# Altium PCB MSP430F2132.PcbDoc
Units mm, origin at the board's own origin, x right, y up, seen from the top; angles counter-clockwise.
Board outline 84.5 x 50 mm, 2 copper layers (Top Layer, Bottom Layer); 56 components, 60 nets, 235 pads, 57 vias.
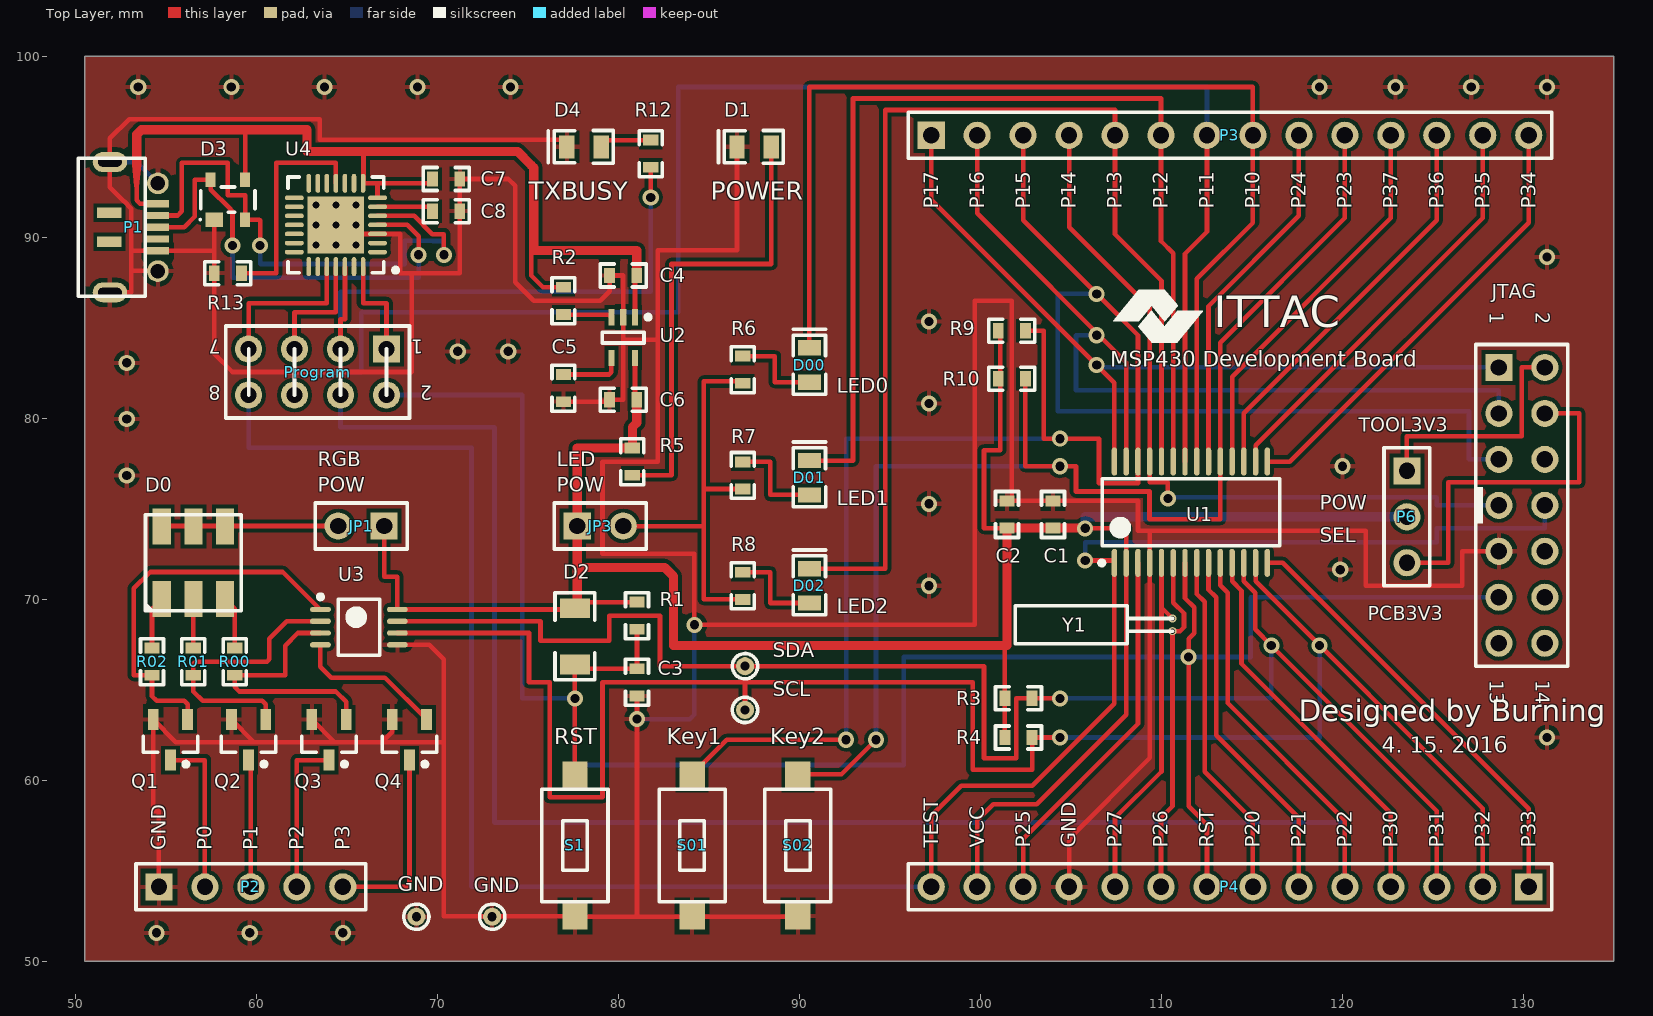
[diagram p0: Top Layer view]
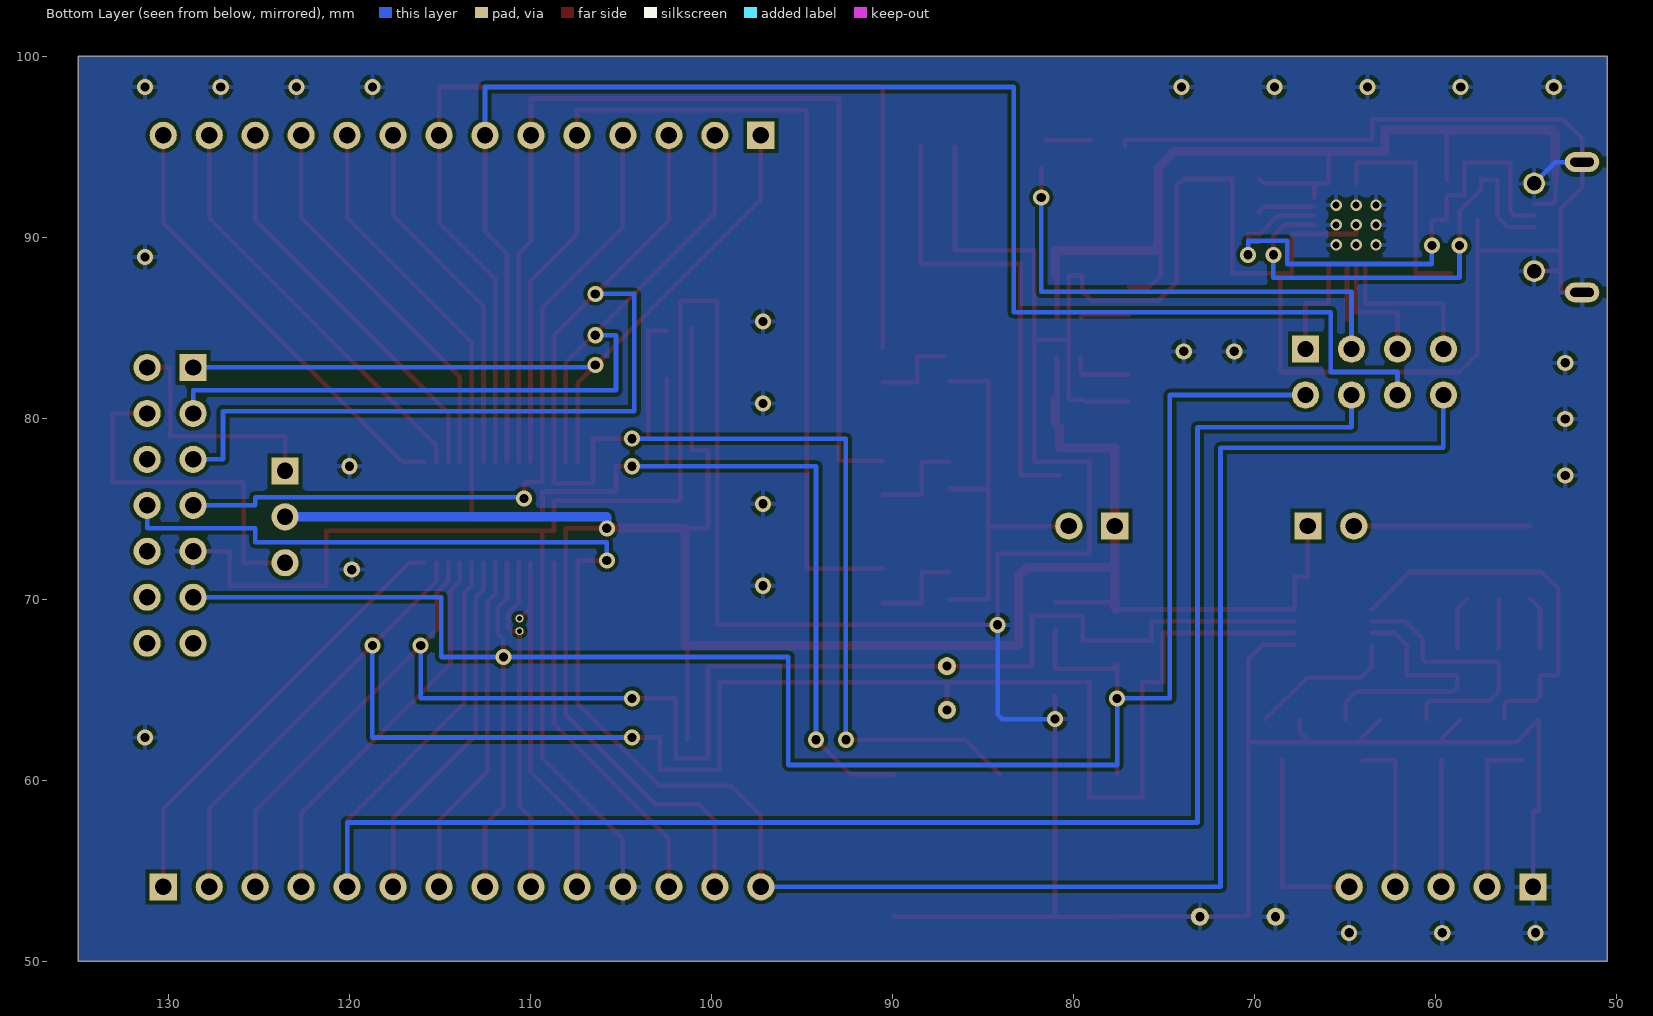
[diagram p1: Bottom Layer view, seen from below]

## Layer stack, top to bottom
Top Solder: solder mask 0.0102, Solder Resist, Dk 3.5
Top Layer: signal copper 0.0356
Dielectric 1: dielectric 0.32, FR-4, Dk 4.8
Bottom Layer: signal copper 0.0356
Bottom Solder: solder mask 0.0102, Solder Resist, Dk 3.5

## Board outline
50.5,50 50.5,100 135,100 135,50

## Design rules (kind name [scope] priority, off if disabled: settings)
Clearance [All] p1: gap=0.203
PolygonConnect [All] p1: connectstyle=Relief reliefconductorwidth=0.254 reliefentries=4 polygonreliefangle="90 Angle" airgapwidth=0.254
RoutingVias [All] p1: holewidth=0.711 width=1.27 viastyle="Through Hole" minholewidth=0.3 minwidth=0.5 maxholewidth=0.711 maxwidth=2
SolderMaskExpansion [All] p1: expansion=0.102
UnpouredPolygon [All] p1: allowunpoured=FALSE
Width [All] p1: maxlimit=0.762 minlimit=0.254 preferedwidth=0.254
29 further rules are at their usual default settings.

## Components (designator, comment, footprint, x,y, rotation, side; value= is the part's Value field where it differs from the comment)
C1 "Cap" D0603 104.013,74.676 r270 top
C2 "Cap" D0603 101.473,74.676 r270 top
C3 "Cap" D0603 81.026,65.405 r90 top
C4 "Cap" D0603 80.264,87.884 r0 top
C5 "Cap" D0603 76.962,81.661 r90 top
C6 "Cap" D0603 80.264,81.026 r180 top
C7 "Cap" D0603 70.485,93.218 r0 top
C8 "Cap" D0603 70.485,91.44 r180 top
D00 "LED0" D0805_Diode 90.551,82.931 r90 top
D0 "RGB_LED" LED5050 56.515,72.009 r270 top
D1 "LED0" D0805_Diode 87.503,94.996 r180 top
D01 "LED0" D0805_Diode 90.551,76.708 r90 top
D2 "1N4148" D1206 77.597,67.945 r90 top
D02 "LED0" D0805_Diode 90.551,70.739 r90 top
D3 "SP0503BAHT" SOT143_4 58.42,92.075 r90 top
D4 "LED0" D0805_Diode 78.105,94.996 r180 top
GND "TP" TP0_8 68.834,52.451 r90 top (schematic designator TP4)
GND "TP" TP0_8 73.025,52.451 r0 top (schematic designator TP1)
JP1 "JP" HDR1X2 67.056,74.041 r180 top
JP3 "JP" HDR1X2 77.724,74.041 r0 top
JTAG "Header 7X2" HDR2X7 128.651,82.804 r270 top
P1 "Micro USB" Micro.Horn 53.213,90.551 r90 top
P2 "Header 5" HDR1X5 54.61,54.102 r0 top
P3 "Header 14" HDR1X14 97.282,95.631 r0 top
P4 "Header 14" HDR1X14 130.302,54.102 r180 top
P6 "Header 3" HDR1X3 123.571,77.089 r270 top
Program "Header 4X2" HDR2X4 67.183,83.82 r180 top (schematic designator JP4)
Q1 "NMOS-2" SOT23_N 55.245,62.23 r270 top
Q2 "NMOS-2" SOT23_N 59.563,62.23 r270 top
Q3 "NMOS-2" SOT23_N 64.008,62.23 r270 top
Q4 "NMOS-2" SOT23_N 68.453,62.23 r270 top
R00 "Res1" D0603 58.801,66.548 r270 top
R1 "Res1" D0603 81.026,69.088 r90 top
R01 "Res1" D0603 56.515,66.548 r270 top
R2 "Res1" D0603 76.962,86.487 r90 top
R02 "Res1" D0603 54.229,66.548 r270 top
R3 "Res1" D0603 102.108,64.516 r0 top
R4 "Res1" D0603 102.108,62.357 r0 top
R5 "Res1" D0603 80.772,77.597 r90 top
R6 "Res1" D0603 86.868,82.677 r270 top
R7 "Res1" D0603 86.868,76.835 r270 top
R8 "Res1" D0603 86.868,70.739 r270 top
R9 "Res1" D0603 101.734,84.836 r180 top
R10 "Res1" D0603 101.734,82.169 r180 top
R12 "Res1" D0603 81.788,94.615 r270 top
R13 "Res1" D0603 58.42,88.011 r0 top
S1 "SW-PB" SW_A 77.597,56.388 r90 top
S01 "SW-PB" SW_A 84.074,56.388 r270 top
S02 "SW-PB" SW_A 89.916,56.388 r270 top
SCL "TP" TP0_8 86.995,63.881 r90 top (schematic designator TP3)
SDA "TP" TP0_8 86.995,66.294 r90 top (schematic designator TP2)
U1 "MSP430F21x2" TSSOP28 111.633,74.803 r90 top
U2 "RT9193" SC70-5 80.264,84.455 r270 top
U3 "PCA9633DP1" TSSOP8 65.659,68.453 r0 top
U4 "CP2102" QFN28 64.389,90.678 r180 top
Y1 "XTAL" XTAL2X6 110.617,68.58 r0 top

## Footprints (in the part's own frame and the unit in brackets; to place one, negate y for a bottom-side part, rotate by r counter-clockwise, add the part's x,y. Pads: shape width x height; smd on the part's side, far side on the other; paste and mask are expansions set on the pad)
D0603 [mm] "D0603"
  rect 0.6x0.85 smd: 1(-0.75,0) 2(0.75,0)
  silkscreen extent -1.27,-0.64 1.27,0.64, body extent -0.8,-0.4 0.8,0.4, height 0.5
D0805_Diode [mm] "D0805 Diode"
  rect 0.85x1.27 smd: 1(-0.95,0) 2(0.95,0)
  silkscreen extent -1.6,-0.9 1.97,0.9, body extent -1,-0.64 1,0.64, height 1.25
D1206 [mm] "D1206"
  rect 1.1x1.65 smd: 1(-1.55,0) 2(1.55,0)
  silkscreen extent -2.4,-1.1 2.4,1.1, body extent -1.6,-0.8 1.6,0.8, height 1.1
HDR1X2 [mm] "Connector; Header; 2 Position"
  rect 1.5x1.5 hole 0.9: 1(0,0)
  round 1.5 hole 0.9: 2(2.54,0)
  silkscreen extent -1.27,-1.27 3.81,1.27
HDR1X3 [mm] "Connector; Header; 3 Position"
  rect 1.5x1.5 hole 0.9: 1(0,0)
  round 1.5 hole 0.9: 2(2.54,0) 3(5.08,0)
  silkscreen extent -1.27,-1.27 6.35,1.27
HDR1X5 [mm] "Connector; Header; 5 Position"
  rect 1.5x1.5 hole 0.9: 1(0,0)
  round 1.5 hole 0.9: 2(2.54,0) 3(5.08,0) 4(7.62,0) 5(10.16,0)
  silkscreen extent -1.27,-1.27 11.43,1.27
HDR1X14 [mm] "Connector; Header; 14 Position"
  rect 1.5x1.5 hole 0.9: 1(0,0)
  round 1.5 hole 0.9: 2(2.54,0) 3(5.08,0) 4(7.62,0) 5(10.16,0) 6(12.7,0) 7(15.24,0) 8(17.78,0) 9(20.32,0) 10(22.86,0) 11(25.4,0) 12(27.94,0) 13(30.48,0) 14(33.02,0)
  silkscreen extent -1.27,-1.27 34.29,1.27
HDR2X4 [mm] "Connector; Header; 4x2 Position"
  rect 1.5x1.5 hole 0.9: 1(0,0)
  round 1.5 hole 0.9: 2(0,2.54) 3(2.54,0) 4(2.54,2.54) 5(5.08,0) 6(5.08,2.54) 7(7.62,0) 8(7.62,2.54)
  silkscreen extent -1.27,-1.27 8.89,3.81
HDR2X7 [mm] "Connector; Header; 7x2 Position"
  rect 1.5x1.5 hole 0.9: 1(0,0)
  round 1.5 hole 0.9: 2(0,2.54) 3(2.54,0) 4(2.54,2.54) 5(5.08,0) 6(5.08,2.54) 7(7.62,0) 8(7.62,2.54) 9(10.16,0) 10(10.16,2.54) 11(12.7,0) 12(12.7,2.54) 13(15.24,0) 14(15.24,2.54)
  silkscreen extent -1.27,-1.27 16.51,3.81
LED5050 [mm] "LED5050"
  rect 2x1 smd mask+0.05: 1(-2,1.75) 2(-2,0) 3(-2,-1.75) 4(2,-1.75) 5(2,0) 6(2,1.75)
  silkscreen extent -2.65,-2.65 2.65,2.65, body extent -2.5,-2.5 2.5,2.5, height 1.6
Micro.Horn [mm]
  oval 1.1x1.9 hole 0.5 slot 1.3 at 90 deg: 0(-3.6,1.313) 0(3.6,1.313)
  round 1.2 hole 0.8: 0(-2.425,-1.337) 0(2.425,-1.337)
  rect 0.6x1.35 smd: 0(-0.8,1.338) 0(0.8,1.338)
  rect 0.4x1.25 smd: 1(1.3,-1.337) 2(0.65,-1.337) 3(0,-1.337) 4(-0.65,-1.337) 5(-1.3,-1.337)
  silkscreen extent -3.81,-0.64 3.81,3.06
QFN28 [mm] "QFN, 28-Leads, Body 5.00x5.00mm, Pitch 0.50mm, Thermal Pad 3.13x3.13mm, IPC Medium Density"
  oval 1.05x0.25 smd: 1(-2.3,1.5) 2(-2.3,1) 3(-2.3,0.5) 4(-2.3,0) 5(-2.3,-0.5) 6(-2.3,-1) 7(-2.3,-1.5) 15(2.3,-1.5) 16(2.3,-1) 17(2.3,-0.5) 18(2.3,0) 19(2.3,0.5) 20(2.3,1) 21(2.3,1.5)
  oval 0.25x1.05 smd: 8(-1.5,-2.3) 9(-1,-2.3) 10(-0.5,-2.3) 11(0,-2.3) 12(0.5,-2.3) 13(1,-2.3) 14(1.5,-2.3) 22(1.5,2.3) 23(1,2.3) 24(0.5,2.3) 25(0,2.3) 26(-0.5,2.3) 27(-1,2.3) 28(-1.5,2.3)
  rect 3.13x3.13 smd: 29(0,0)
  silkscreen extent -3.43,-2.65 2.65,2.65, body extent -2.5,-2.5 2.5,2.5, height 1
SC70-5 [mm] "SC70, 5-Leads, Body 2.03x2.13mm, Pitch 0.65mm, IPC Medium Density"
  rect 0.9x0.35 smd: 1(-1.125,0.65) 2(-1.125,0) 3(-1.125,-0.65) 4(1.125,-0.65) 5(1.125,0.65)
  silkscreen extent -1.25,-1.15 0.3,1.5, body extent -0.67,-1.12 0.67,1.13, height 1.1
SOT23_N [mm] "SOT23, 3-Leads, Body 2.9x1.3mm, Pitch 0.95mm, Lead Span 2.3mm - Reverse Pinning, IPC Medium Density"
  rect 1.15x0.6 smd: 1(-1.125,0.95) 2(1.125,0) 3(-1.125,-0.95)
  silkscreen extent -0.2,-1.5 1.47,1.5, body extent -0.7,-1.5 0.7,1.5, height 1.1
SOT143_4 [mm] "SOT143, 4-Leads, Body 2.92x2.37mm, Pitch 1.90mm, IPC High Density"
  rect 0.8x0.95 smd: 1(-1.1,0.75)
  rect 0.8x0.55 smd: 2(-1.1,-0.95) 3(1.1,-0.95) 4(1.1,0.95)
  silkscreen extent -1.15,-1.5 0.7,1.57, body extent -0.7,-1.52 0.7,1.52, height 1.2
SW_A [mm] "SMA Switch"
  rect 1.5x1.4 smd mask+0.05: 1(-3.9,0) 2(3.9,0)
  silkscreen extent -3.1,-1.83 3.1,1.83, body extent -3.1,-1.83 3.1,1.83, height 2
TP0_8 [mm] "Test Point"
  round 1 hole 0.5 mask+0.05: 1(0,0)
  silkscreen extent -0.7,-0.7 0.7,0.7
TSSOP8 [mm] "TSOP, 8-Leads, Body 3.00x3.00mm, Pitch 0.65mm, IPC Medium Density"
  oval 1.15x0.3 smd: 1(-2.125,0.975) 2(-2.125,0.325) 3(-2.125,-0.325) 4(-2.125,-0.975) 5(2.125,-0.975) 6(2.125,-0.325) 7(2.125,0.325) 8(2.125,0.975)
  silkscreen extent -2.25,-1.55 1.15,1.8, body extent -1.55,-1.55 1.55,1.55, height 1.1
TSSOP28 [mm] "TSOP, 28-Leads, Body 9.70x4.40mm, Pitch 0.65mm, IPC High Density"
  oval 1.55x0.3 smd: 1(-2.8,4.225) 2(-2.8,3.575) 3(-2.8,2.925) 4(-2.8,2.275) 5(-2.8,1.625) 6(-2.8,0.975) 7(-2.8,0.325) 8(-2.8,-0.325) 9(-2.8,-0.975) 10(-2.8,-1.625) 11(-2.8,-2.275) 12(-2.8,-2.925) 13(-2.8,-3.575) 14(-2.8,-4.225) 15(2.8,-4.225) 16(2.8,-3.575) 17(2.8,-2.925) 18(2.8,-2.275) 19(2.8,-1.625) 20(2.8,-0.975) 21(2.8,-0.325) 22(2.8,0.325) 23(2.8,0.975) 24(2.8,1.625) 25(2.8,2.275) 26(2.8,2.925) 27(2.8,3.575) 28(2.8,4.225)
  silkscreen extent -2.92,-4.9 1.85,5.05, body extent -2.25,-4.9 2.25,4.9, height 1.2
XTAL2X6 [mm] "XTAL2"
  round 0.45 hole 0.3 mask+0.05: 1(0,0.35) 2(0,-0.35)
  silkscreen extent -8.7,-1.05 0,1.05, body extent -8.7,-1.05 -2.5,1.05, height 2.1

## Part data
C1 C2 C3 C4 C5 C6 C7 C8: "Capacitor"
D00 D1 D01 D02 D4: "Typical INFRARED GaAs LED"
D2: library part "Diode 1N4148", "High Conductance Fast Diode"
JP1 JP3: library part "Header 2", "Header, 2-Pin"
JTAG: "Header, 7-Pin, Dual row"
P1: library part "Micro USB Horn", "MIcro USB Connector Horn"
P2: "Header, 5-Pin"
P3 P4: "Header, 14-Pin"
P6: "Header, 3-Pin"
Program: "Header, 4-Pin, Dual row"
Q1 Q2 Q3 Q4: "N-Channel Power MOSFET"
R00 R1 R01 R2 R02 R3 R4 R5 R6 R7 R8 R9 R10 R12 R13: "Resistor"
S1 S01 S02: "Switch"
U1: library part MSP430F21x2_PW, "MSP430F21x2_PW"
U2: "3V3 Voltage Regulator"
Y1: "Crystal Oscillator"

## Via types
v1: diameter 0.889, hole 0.508, Top Layer to Bottom Layer, tented both sides, 48 vias
v2: diameter 0.635, hole 0.381, Top Layer to Bottom Layer, tented both sides, 9 vias

## Nets (pads, with @x,y where several pads share a name; then routed paths per layer and width w, separated by ;. In a path a pad name is that pad's centre, name@x,y a point inside that pad or via, vN(x,y) a via of type N, cw(c..) or ccw(c..) an arc to the next point about the centre after c; other vN are vias at no path point)
3V3: C1.2 C2.2 C6.1 D2.2 JP1.1 JP3.1 P4.13 P6.2 R1.2 R3.1 R4.1 R5.2 R9.2 R10.2 U1.2 U2.5 U3.8 | length 137.7
  Top Layer w0.254: JP1.1 67.056,71.247 67.784,71.247 U3.8 D2.2@77.597,69.428 ; D2.2@77.724,69.838 R1.2 ; U2.5 80.914,81.126 C6.1 ; P4.13 99.822,57.785 100.711,58.674 103.124,58.674 108.058,63.608 U1.2 108.058,73.926 v1@105.791,73.926 ; R9.2@101.104,84.963 101.092,84.963 101.092,78.232 100.203,78.232 100.203,73.926 C2.2 ; R4.1@101.358,62.23 R3.1 101.358,67.195
  Top Layer w0.508: D2.2@77.597,69.428 77.724,69.555 77.724,69.838 77.724,71.755 ; C6.1 81.014,79.744 80.772,79.502 R5.2 77.724,78.347 JP3.1 77.724,71.755 ; v1@105.791,73.926 C1.2 C2.2 101.473,67.437 83.045,67.437 83.045,71.26 82.55,71.755 77.724,71.755
  Bottom Layer w0.508: v1(105.791,73.914) 105.791,74.549 P6.2
5V: C4.2 C7.1 D3.3 P1.1 R2.2 U2.1 U4.7 U4.8 | length 59.8
  Top Layer w0.254: 53.38,94.02 53.38,92.035 53.564,91.851 P1.1 ; D3.3 59.37,95.936 ; 65.913,94.742 65.913,93.002 U4.8 69.495,92.978 C7.1 ; U4.7 66.689,92.865 ; 75.184,93.98 75.184,87.884 75.831,87.237 R2.2 ; U2.1 80.914,87.784 C4.2
  Top Layer w0.508: 53.38,94.02 53.38,95.671 53.645,95.936 59.37,95.936 62.789,95.936 62.789,94.742 65.913,94.742 74.422,94.742 75.184,93.98 75.323,93.841 75.323,89.269 81.014,89.269 C4.2
D+: D3.4 P1.3 U4.4 | length 26.2
  Top Layer w0.254: P1.3 56.007,90.551 56.599,91.143 56.599,93.175 D3.4 57.47,92.632 58.485,91.618 58.496,91.618 58.674,91.44 v1(58.674,89.535) ; U4.4 68.326,90.678 68.961,90.043 v1(68.961,89.027)
  Bottom Layer w0.254: v1(58.674,89.535) 58.674,87.757 68.961,87.757 v1(68.961,89.027)
D-: D3.2 P1.2 U4.5 | length 31.4
  Top Layer w0.254: P1.2 55.641,91.201 55.88,91.44 55.88,94.107 58.42,94.107 58.42,92.329 59.37,92.329 D3.2 60.155,90.975 60.198,90.932 v1(60.198,89.535) ; U4.5 68.715,91.178 69.723,90.17 70.358,90.17 v1(70.358,89.027)
  Bottom Layer w0.254: v1(60.198,89.535) 60.198,88.519 68.186,88.519 68.186,89.802 69.736,89.802 69.736,89.789 70.358,89.789 v1(70.358,89.027)
DTR: Program.1 U4.28 | length 5.9
  Top Layer w0.254: U4.28 65.889,86.36 67.183,86.36 Program.1
GND: C1.1 C2.1 C3.1 C4.1 C5.1 C6.2 C7.2 C8.1 D1.2 D3.1 D4.2 GND.1 JTAG.9 P1.0@51.9,86.951 P1.0@51.9,94.151 P1.0@54.55,88.126 P1.0@54.55,92.976 P1.5 P2.1 P4.11 Q1.3 Q2.3 Q3.3 Q4.3 R13.1 S1.1 S01.2 S02.2 U1.4 U2.2 U3.5 U4.3 U4.29 | length 342.5
  Top Layer w0.254: P1.0@51.9,86.951 53.086,86.951 53.086,88.138 ; P1.0@54.55,88.126 54.538,88.138 53.086,88.138 ; P2.1 54.61,58.293 54.295,58.293 Q1.3 55.547,62.103 59.865,62.103 ; 57.64,89.251 P1.5 53.086,89.251 ; D3.1 R13.1 57.67,83.554 58.674,82.55 68.58,82.55 68.58,88.011 ; Q2.3 59.865,62.103 ; Q3.3 64.31,62.103 ; v2(64.389,90.678) 64.389,90.178 U4.3 67.945,90.178 67.945,88.011 68.58,88.011 ; Q4.3 67.503,62.677 66.929,62.103 ; U3.5 69.555,67.478 70.358,66.675 70.358,52.488 S1.1 77.634,52.451 81.026,52.451 ; 70.358,62.103 66.929,62.103 ; C5.1 79.399,80.911 C6.2 80.264,81.026 80.264,84.328 ; D4.2 77.155,95.377 63.5,95.377 63.5,96.52 52.959,96.52 51.9,95.461 51.9,94.151 51.9,92.753 52.672,91.981 52.687,91.981 53.086,91.582 53.086,89.251 ; C3.1 v1(81.026,63.373) 81.026,52.451 ; 82.169,84.328 80.264,84.328 ; D1.2 86.553,89.281 82.169,89.281 82.169,77.597 79.121,77.597 79.121,72.517 84.201,72.517 v1(84.201,68.58) 99.695,68.58 99.695,86.487 101.734,86.487 101.734,81.287 101.727,81.287 101.727,75.426 C1.1 108.712,75.426 108.712,73.787 109.358,73.787 ; S02.2 89.916,52.451 81.026,52.451 ; P4.11 104.902,56.769 109.358,61.225 U1.4 109.358,73.787 ; JTAG.9 126.619,72.644 126.619,70.739 121.285,70.739 121.285,73.787 109.358,73.787 ; 53.086,88.138 53.086,89.251 ; 59.865,62.103 64.31,62.103 ; 64.31,62.103 66.929,62.103 ; 68.58,88.011 71.235,88.011 C8.1 C7.2 73.914,93.218 74.295,92.837 74.295,87.503 75.311,86.487 78.994,86.487 79.514,87.007 C4.1 80.264,87.884 U2.2 80.264,84.328
  Bottom Layer w0.254: P1.0@51.9,94.151 53.375,94.151 P1.0@54.55,92.976 ; v1(81.026,63.373) 83.947,63.373 84.201,63.627 v1(84.201,68.58)
  other v1: 54.483,51.562 59.627,51.562 64.77,51.562 131.318,62.357 97.155,70.739 119.888,71.628 97.155,75.269 52.832,76.835 120.015,77.343 52.832,79.947 97.155,80.814 52.832,83.058 71.12,83.693 73.914,83.693 97.155,85.344 131.318,88.9 53.467,98.298 58.61,98.298 63.754,98.298 68.897,98.298 74.041,98.298 118.745,98.298 122.936,98.298 127.127,98.298 131.318,98.298
  other v2: 63.289,89.578 64.389,89.578 65.489,89.578 63.289,90.678 65.489,90.678 63.289,91.778 64.389,91.778 65.489,91.778
LED0: Q1.1 R02.2 U3.1 | length 21.5
  Top Layer w0.254: Q1.1 56.195,64.201 56.007,64.389 54.483,64.389 54.229,64.643 R02.2 53.225,65.798 53.225,70.6 54.126,71.501 61.461,71.501 U3.1
LED1: Q2.1 R01.2 U3.2 | length 15.3
  Top Layer w0.254: Q2.1 60.513,64.201 60.325,64.389 57.023,64.389 56.515,64.897 R01.2 56.515,66.421 56.642,66.548 60.579,66.548 60.706,66.675 60.706,67.818 61.666,68.778 U3.2
LED2: Q3.1 R00.2 U3.3 | length 14.8
  Top Layer w0.254: U3.3 62.286,68.128 61.583,67.425 61.583,65.798 R00.2 58.801,65.151 59.055,64.897 64.389,64.897 64.958,64.328 Q3.1
LED3: Q4.1 U3.4 | length 8.3
  Top Layer w0.254: U3.4 63.534,66.26 64.135,65.659 67.099,65.659 Q4.1
LED_P0: P2.2 Q1.2 | length 8.9
  Top Layer w0.254: Q1.2 57.15,61.105 P2.2
LED_P1: P2.3 Q2.2 | length 7.1
  Top Layer w0.254: Q2.2 59.69,61.105 P2.3
LED_P2: P2.4 Q3.2 | length 8.8
  Top Layer w0.254: P2.4 62.23,61.105 Q3.2
LED_P3: P2.5 Q4.2 | length 10.7
  Top Layer w0.254: P2.5 68.453,54.102 Q4.2
NetC5_2: C5.2 U2.4 | length 3.5
  Top Layer w0.254: C5.2 79.49,82.411 79.614,82.535 U2.4
NetC8_2: C8.2 U4.6 | length 3.3
  Top Layer w0.254: U4.6 69.497,91.678 C8.2 C8.2@69.735,91.313
NetD0_1: D0.1 D0.2 D0.3 JP1.2 | length 9.8
  Top Layer w0.254: D0.3 54.797,74.041 JP1.2
NetD00_1: D00.1 R6.1 | length 4.9
  Top Layer w0.254: R6.1@87.122,83.427 88.646,83.427 88.646,81.981 D00.1
NetD0_4: D0.4 R02.1 | length 2.9
  Top Layer w0.254: R02.1 54.229,69.473 D0.4
NetD0_5: D0.5 R01.1 | length 2.7
  Top Layer w0.254: R01.1 D0.5
NetD0_6: D0.6 R00.1 | length 2.9
  Top Layer w0.254: D0.6 58.801,69.473 R00.1
NetD1_1: D1.1 R5.1 | length 25.8
  Top Layer w0.254: R5.1 82.931,76.847 82.931,88.519 88.453,88.519 D1.1
NetD01_1: D01.1 R7.1 | length 5.5
  Top Layer w0.254: R7.1 88.392,77.585 88.392,75.758 D01.1
NetD02_1: D02.1 R8.1 | length 5.4
  Top Layer w0.254: R8.1 88.392,71.489 88.392,69.789 D02.1
NetD4_1: D4.1 R12.1 | length 2.5
  Top Layer w0.254: D4.1@79.055,95.365 R12.1@81.534,95.365
NetJP3_2: JP3.2 R6.2 R7.2 R8.2 | length 23
  Top Layer w0.254: JP3.2 80.276,74.029 84.721,74.029 ; R8.2 84.721,69.989 84.721,74.029 ; R7.2 84.745,76.085 84.721,76.061 ; R6.2@86.868,82.054 86.844,82.03 84.721,82.03 84.721,76.061 ; 84.721,74.029 84.721,76.061
NetR2_1: R2.1 U2.3 | length 2.7
  Top Layer w0.254: R2.1@76.962,85.713 79.481,85.713 U2.3
OTG: P1.4
P10: D00.2 P3.8 U1.21 | length 60.9
  Top Layer w0.254: D00.2 90.551,98.298 115.062,98.298 P3.8 115.062,90.805 111.958,87.701 U1.21
P11: P3.7 Program.6 U1.22 | length 88.6
  Top Layer w0.254: U1.22 111.308,89.083 112.522,90.297 P3.7
  Bottom Layer w0.254: Program.6 62.103,82.55 65.786,82.55 65.786,85.852 83.312,85.852 83.312,98.298 112.522,98.298 P3.7
P12: D01.2 P3.6 U1.23 | length 59.8
  Top Layer w0.254: D01.2 92.964,77.658 92.964,97.663 109.982,97.663 P3.6 109.982,89.789 110.658,89.113 U1.23
P13: D02.2 P3.5 U1.24 | length 62.7
  Top Layer w0.254: D02.2 94.742,71.689 94.742,97.028 107.442,97.028 P3.5 107.442,90.17 110.008,87.604 U1.24
P14: JTAG.7 P3.4 U1.25 | length 41.7
  Top Layer w0.254: P3.4 104.902,90.551 109.358,86.095 U1.25 109.358,76.454 110.363,76.454 v1(110.363,75.565)
  Bottom Layer w0.254: v1(110.363,75.565) 110.363,75.629 125.222,75.629 125.222,75.184 JTAG.7
P15: JTAG.5 P3.3 R9.1 S01.1 U1.26 | length 110
  Top Layer w0.254: S01.1 84.074,60.325 85.979,62.23 v1(92.583,62.23) ; P3.3 102.362,90.932 v1(106.426,86.868) 108.708,84.586 U1.26 108.708,76.403 106.553,76.403 106.553,78.867 v1(104.394,78.867) 103.505,78.867 103.505,84.836 R9.1
  Bottom Layer w0.254: v1(92.583,62.23) 92.583,78.867 v1(104.394,78.867) ; v1(106.426,86.868) 104.267,86.868 104.267,80.391 127,80.391 127,77.724 JTAG.5
P16: JTAG.3 P3.2 U1.27 | length 50.3
  Top Layer w0.254: P3.2 99.822,91.313 108.058,83.077 U1.27
  Bottom Layer w0.254: v1(106.426,84.582) 105.283,84.582 105.283,81.534 128.651,81.534 JTAG.3
P17: JTAG.1 P3.1 U1.28 | length 44.6
  Top Layer w0.254: P3.1 97.282,92.075 v1(106.426,82.931) 107.408,81.949 U1.28
  Bottom Layer w0.254: v1(106.426,82.931) 106.426,82.804 JTAG.1
P20: P4.7 U1.8 | length 19.2
  Top Layer w0.254: U1.8 111.958,70.287 112.395,69.85 112.395,60.452 115.062,57.785 P4.7
P21: P4.6 U1.9 | length 20
  Top Layer w0.254: U1.9 112.608,70.526 113.03,70.104 113.03,62.484 117.602,57.912 P4.6
P22: P4.5 Program.4 U1.10 | length 103.4
  Top Layer w0.254: U1.10 113.258,70.765 113.665,70.358 113.665,64.262 120.142,57.785 P4.5
  Bottom Layer w0.254: Program.4 64.643,79.502 73.152,79.502 73.152,57.658 120.142,57.658 P4.5
P23: P3.10 R10.1 S02.1 U1.19 | length 73
  Top Layer w0.254: S02.1 89.916,60.325 92.329,60.325 v1(94.234,62.23) ; R10.1 102.484,77.343 v1(104.394,77.343) 105.283,77.343 105.283,75.946 109.347,75.946 109.347,74.422 113.258,74.422 U1.19 113.258,84.175 120.142,91.059 P3.10
  Bottom Layer w0.254: v1(94.234,62.23) 94.234,77.343 v1(104.394,77.343)
P24: P3.9 U1.20 | length 20.1
  Top Layer w0.254: U1.20 112.608,86.192 117.602,91.186 P3.9
P25: P4.12 U1.3 | length 20.5
  Top Layer w0.254: P4.12 102.362,56.769 108.708,63.115 U1.3
P26: P4.9 U1.6 Y1.2 | length 18.9
  Top Layer w0.254: P4.9 109.982,57.912 110.617,58.547 Y1.2 111.029,68.23 111.252,68.453 111.252,69.215 110.658,69.809 U1.6
P27: P4.10 U1.5 Y1.1 | length 19.8
  Top Layer w0.254: P4.10 107.442,57.912 110.008,60.478 110.008,69.539 ; U1.5 110.008,69.539 ; Y1.1 110.008,69.539
P30: P4.4 U1.11 | length 21.5
  Top Layer w0.254: U1.11 113.908,70.992 114.427,70.473 114.427,66.421 122.682,58.166 P4.4
P31: P4.3 R3.2 SDA.1 U1.12 U3.7 | length 87.2
  Top Layer w0.254: U3.7 75.692,68.778 75.692,67.691 79.502,67.691 79.502,69.088 82.296,69.088 82.296,66.294 100.203,66.294 100.203,61.214 101.988,61.214 101.988,64.516 R3.2 v1(104.394,64.516) ; U1.12 114.558,70.989 115.189,70.358 115.189,68.326 v1(116.078,67.437) 125.222,58.293 P4.3
  Bottom Layer w0.254: v1(104.394,64.516) 116.078,64.516 v1(116.078,67.437)
P32: P4.2 R4.2 SCL.1 U1.13 U3.6 | length 102.7
  Top Layer w0.254: U3.6 75.057,68.128 75.057,65.405 76.2,65.405 76.2,59.055 79.121,59.055 79.121,65.405 86.995,65.405 ; SCL.1 86.995,65.405 ; v1(104.394,62.357) R4.2 102.858,60.579 99.568,60.579 99.568,65.405 86.995,65.405 ; U1.13 115.208,70.986 127.762,58.432 P4.2
  Bottom Layer w0.254: v1(104.394,62.357) 118.745,62.357 v1(118.745,67.437)
P33: P4.1 U1.14 | length 24.4
  Top Layer w0.254: U1.14 116.719,72.003 130.302,58.42 P4.1
P34: P3.14 U1.15 | length 24.7
  Top Layer w0.254: U1.15 117.1,77.603 130.302,90.805 P3.14
P35: P3.13 U1.16 | length 23.2
  Top Layer w0.254: U1.16 115.208,78.505 127.762,91.059 P3.13
P36: P3.12 U1.17 | length 22.4
  Top Layer w0.254: U1.17 114.558,80.268 125.222,90.932 P3.12
P37: P3.11 U1.18 | length 21.7
  Top Layer w0.254: U1.18 113.908,82.285 122.682,91.059 P3.11
RST: C3.2 D2.1 JTAG.11 P4.8 Program.2 R1.1 S1.2 U1.7 | length 121.7
  Top Layer w0.254: S1.2 v1(77.597,64.516) D2.1 77.837,66.155 C3.2 R1.1 ; U1.7 111.308,70.048 111.811,69.545 111.811,68.123 111.506,67.818 v1(111.506,66.802) 111.506,58.547 112.522,57.531 P4.8
  Bottom Layer w0.254: Program.2 74.676,81.28 74.676,64.516 v1(77.597,64.516) 77.597,60.833 95.758,60.833 95.758,66.802 v1(111.506,66.802) 114.935,66.802 114.935,70.104 JTAG.11
RTS: Program.7 U4.24 | length 8.9
  Top Layer w0.254: Program.7 59.563,86.36 63.889,86.36 U4.24
RXD: Program.5 U4.25 | length 6.8
  Top Layer w0.254: Program.5 62.103,85.852 64.377,85.852 64.389,85.864 U4.25
SUS-: R13.2 U4.11 | length 12.4
  Top Layer w0.254: R13.2 61.087,88.011 61.087,94.107 64.389,94.107 U4.11
TEST: JTAG.8 P4.14 Program.8 U1.1 | length 119.5
  Top Layer w0.254: P4.14 97.282,58.039 98.933,59.69 102.87,59.69 107.408,64.228 U1.1 107.408,72.136 v1(105.791,72.136)
  Bottom Layer w0.254: Program.8 59.563,78.359 71.882,78.359 71.882,54.102 P4.14 ; v1(105.791,72.136) 105.791,73.139 106.566,73.139 106.566,73.152 125.222,73.152 125.222,73.914 131.191,73.914 JTAG.8
TXD: Program.3 R12.2 U4.26 | length 32.2
  Top Layer w0.254: Program.3@64.889,83.82 Program.3 64.643,85.471 64.889,85.471 U4.26 ; v1(81.788,92.202) R12.2
  Bottom Layer w0.254: Program.3 64.643,86.995 81.788,86.995 v1(81.788,92.202)
VCC_PCB: JTAG.4 P6.3 | length 19.7
  Top Layer w0.254: P6.3 125.857,72.009 125.857,76.454 133.096,76.454 133.096,80.264 JTAG.4
VCC_TOOL: JTAG.2 P6.1 | length 13.3
  Top Layer w0.254: P6.1 123.571,78.994 129.921,78.994 129.921,82.804 JTAG.2
pads on no net: JTAG.6 JTAG.10 JTAG.12 JTAG.13 JTAG.14 P1.0@51.875,89.751 P1.0@51.875,91.351 U4.1 U4.2 U4.9 U4.10 U4.12 U4.13 U4.14 U4.15 U4.16 U4.17 U4.18 U4.19 U4.20 U4.21 U4.22 U4.23 U4.27

## Polygon pours and split planes (outlines as drawn)
GND on Top Layer "Bottom Layer-No Net" (solid, remove dead copper, pour order 4): 50.5,100 50.5,50 135,50 135,100
GND on Bottom Layer "Bottom Layer-No Net" (solid, remove dead copper, pour order 6): 50.5,100 50.5,50 135,50 135,100

## Silkscreen, mask and mechanical layers (free items; w line width, h text height)
Top Overlay:
  drawing of 828 lines, arcs and shapes, not listed
  text "TXBUSY" at 75.057,92.075 h1
  text "POWER" at 85.09,92.075 h1
  text "P17" at 97.663,91.567 h0.8 r90
  text "P16" at 100.203,91.567 h0.8 r90
  text "P15" at 102.743,91.567 h0.8 r90
  text "P14" at 105.283,91.567 h0.8 r90
  text "P13" at 107.823,91.567 h0.8 r90
  text "P12" at 110.363,91.567 h0.8 r90
  text "P11" at 112.903,91.567 h0.8 r90
  text "P10" at 115.443,91.567 h0.8 r90
  text "P24" at 117.983,91.567 h0.8 r90
  text "P23" at 120.523,91.567 h0.8 r90
  text "P37" at 123.063,91.567 h0.8 r90
  text "P36" at 125.603,91.567 h0.8 r90
  text "P35" at 128.143,91.567 h0.8 r90
  text "P34" at 130.683,91.567 h0.8 r90
  text "ITTAC" at 112.903,84.455 h3
  text "MSP430 Development Board" at 107.188,82.55 h1.5
  text "LED0" at 92.075,81.407 h0.8
  text "TOOL3V3" at 120.904,79.248 h0.76
  text "RGB" at 63.373,77.343 h0.8
  text "LED" at 76.581,77.343 h0.8
  text "POW" at 63.373,75.946 h0.8
  text "POW" at 76.581,75.946 h0.8
  text "LED1" at 92.075,75.184 h0.8
  text "POW" at 118.745,74.93 h0.8
  text "SEL" at 118.745,73.152 h0.8
  text "LED2" at 92.075,69.215 h0.8
  text "PCB3V3" at 121.412,68.834 h0.76
  text "Designed by Burning" at 117.602,62.865 h2.03
  text "RST" at 76.454,61.976 h0.89
  text "Key1" at 82.677,61.976 h0.89
  text "Key2" at 88.392,61.976 h0.89
  text "4. 15. 2016" at 122.174,61.214 h1.52
  text "TEST" at 97.663,56.261 h0.8 r90
  text "VCC" at 100.203,56.261 h0.8 r90
  text "P25" at 102.743,56.261 h0.8 r90
  text "GND" at 105.283,56.261 h0.8 r90
  text "P27" at 107.823,56.261 h0.8 r90
  text "P26" at 110.363,56.261 h0.8 r90
  text "RST" at 112.903,56.261 h0.8 r90
  text "P20" at 115.443,56.261 h0.8 r90
  text "P21" at 117.983,56.261 h0.8 r90
  text "P22" at 120.523,56.261 h0.8 r90
  text "P30" at 123.063,56.261 h0.8 r90
  text "P31" at 125.603,56.261 h0.8 r90
  text "P32" at 128.143,56.261 h0.8 r90
  text "P33" at 130.683,56.261 h0.8 r90
  text "GND" at 54.991,56.134 h0.8 r90
  text "P0" at 57.531,56.134 h0.8 r90
  text "P1" at 60.071,56.134 h0.8 r90
  text "P2" at 62.611,56.134 h0.8 r90
  text "P3" at 65.151,56.134 h0.8 r90
Mechanical 1:
  the board outline again, w0.2

## Text inside footprints (layer, text, board x,y; h text height)
JTAG: Top Overlay "2" at 130.683,85.852 h0.76 r270; Top Overlay "1" at 128.143,85.852 h0.76 r270; Top Overlay "14" at 130.683,65.532 h0.76 r270; Top Overlay "13" at 128.143,65.532 h0.76 r270
Program: Top Overlay "2" at 69.723,81.788 h0.76 r180; Top Overlay "1" at 69.215,84.328 h0.76 r180; Top Overlay "7" at 58.039,84.328 h0.76 r180; Top Overlay "8" at 58.039,81.788 h0.76 r180